# Altium PCB PCB1.PcbDoc
Units mil, origin at the board's own origin, x right, y up, seen from the top; angles counter-clockwise.
Board outline 3000 x 3015 mil, 2 copper layers (Top Layer, Bottom Layer); 27 components, 21 nets, 111 pads, 4 vias.
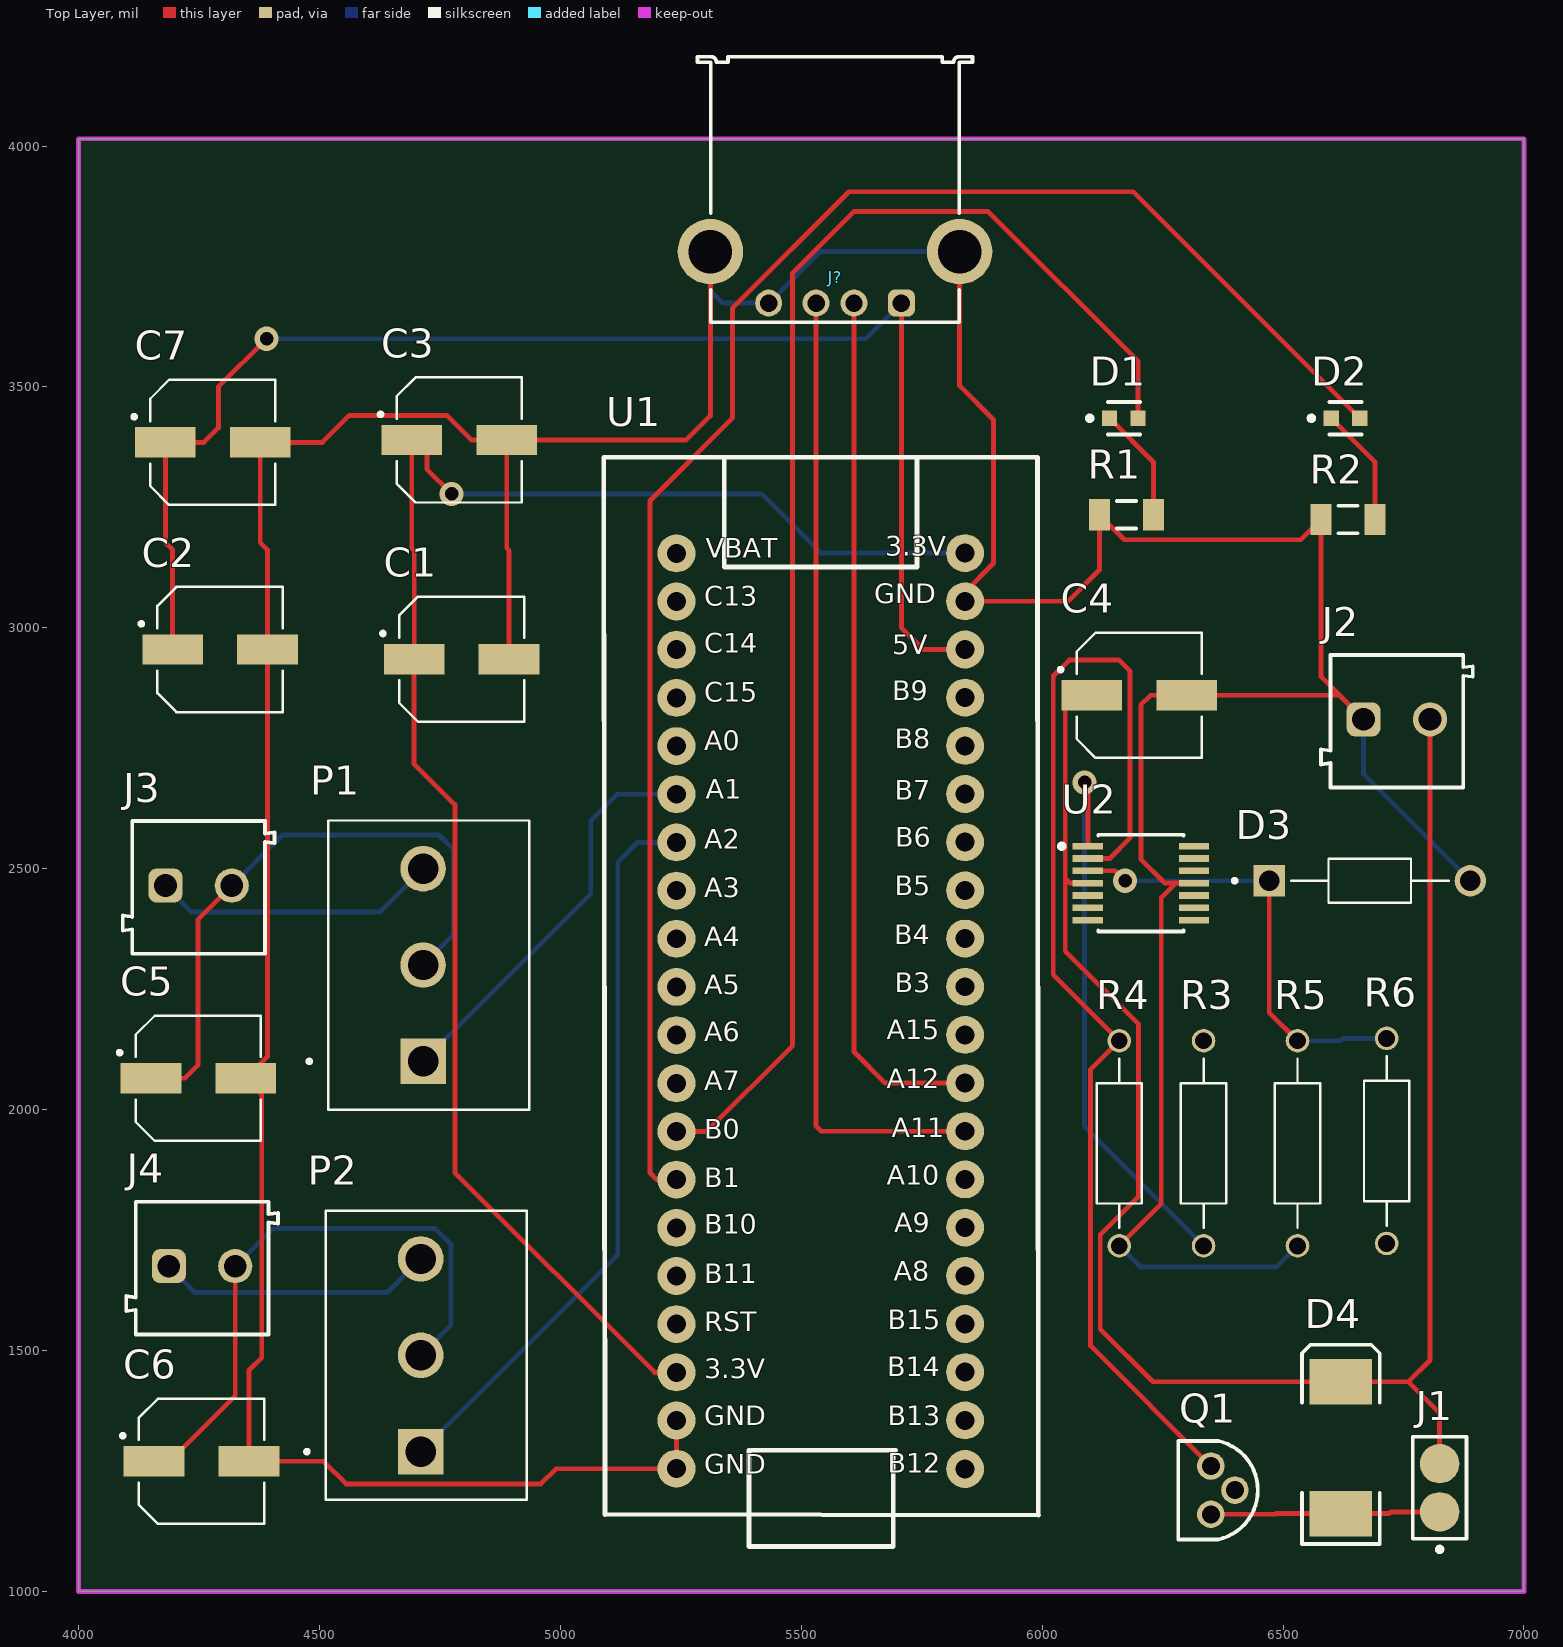
[diagram p0: Top Layer view]
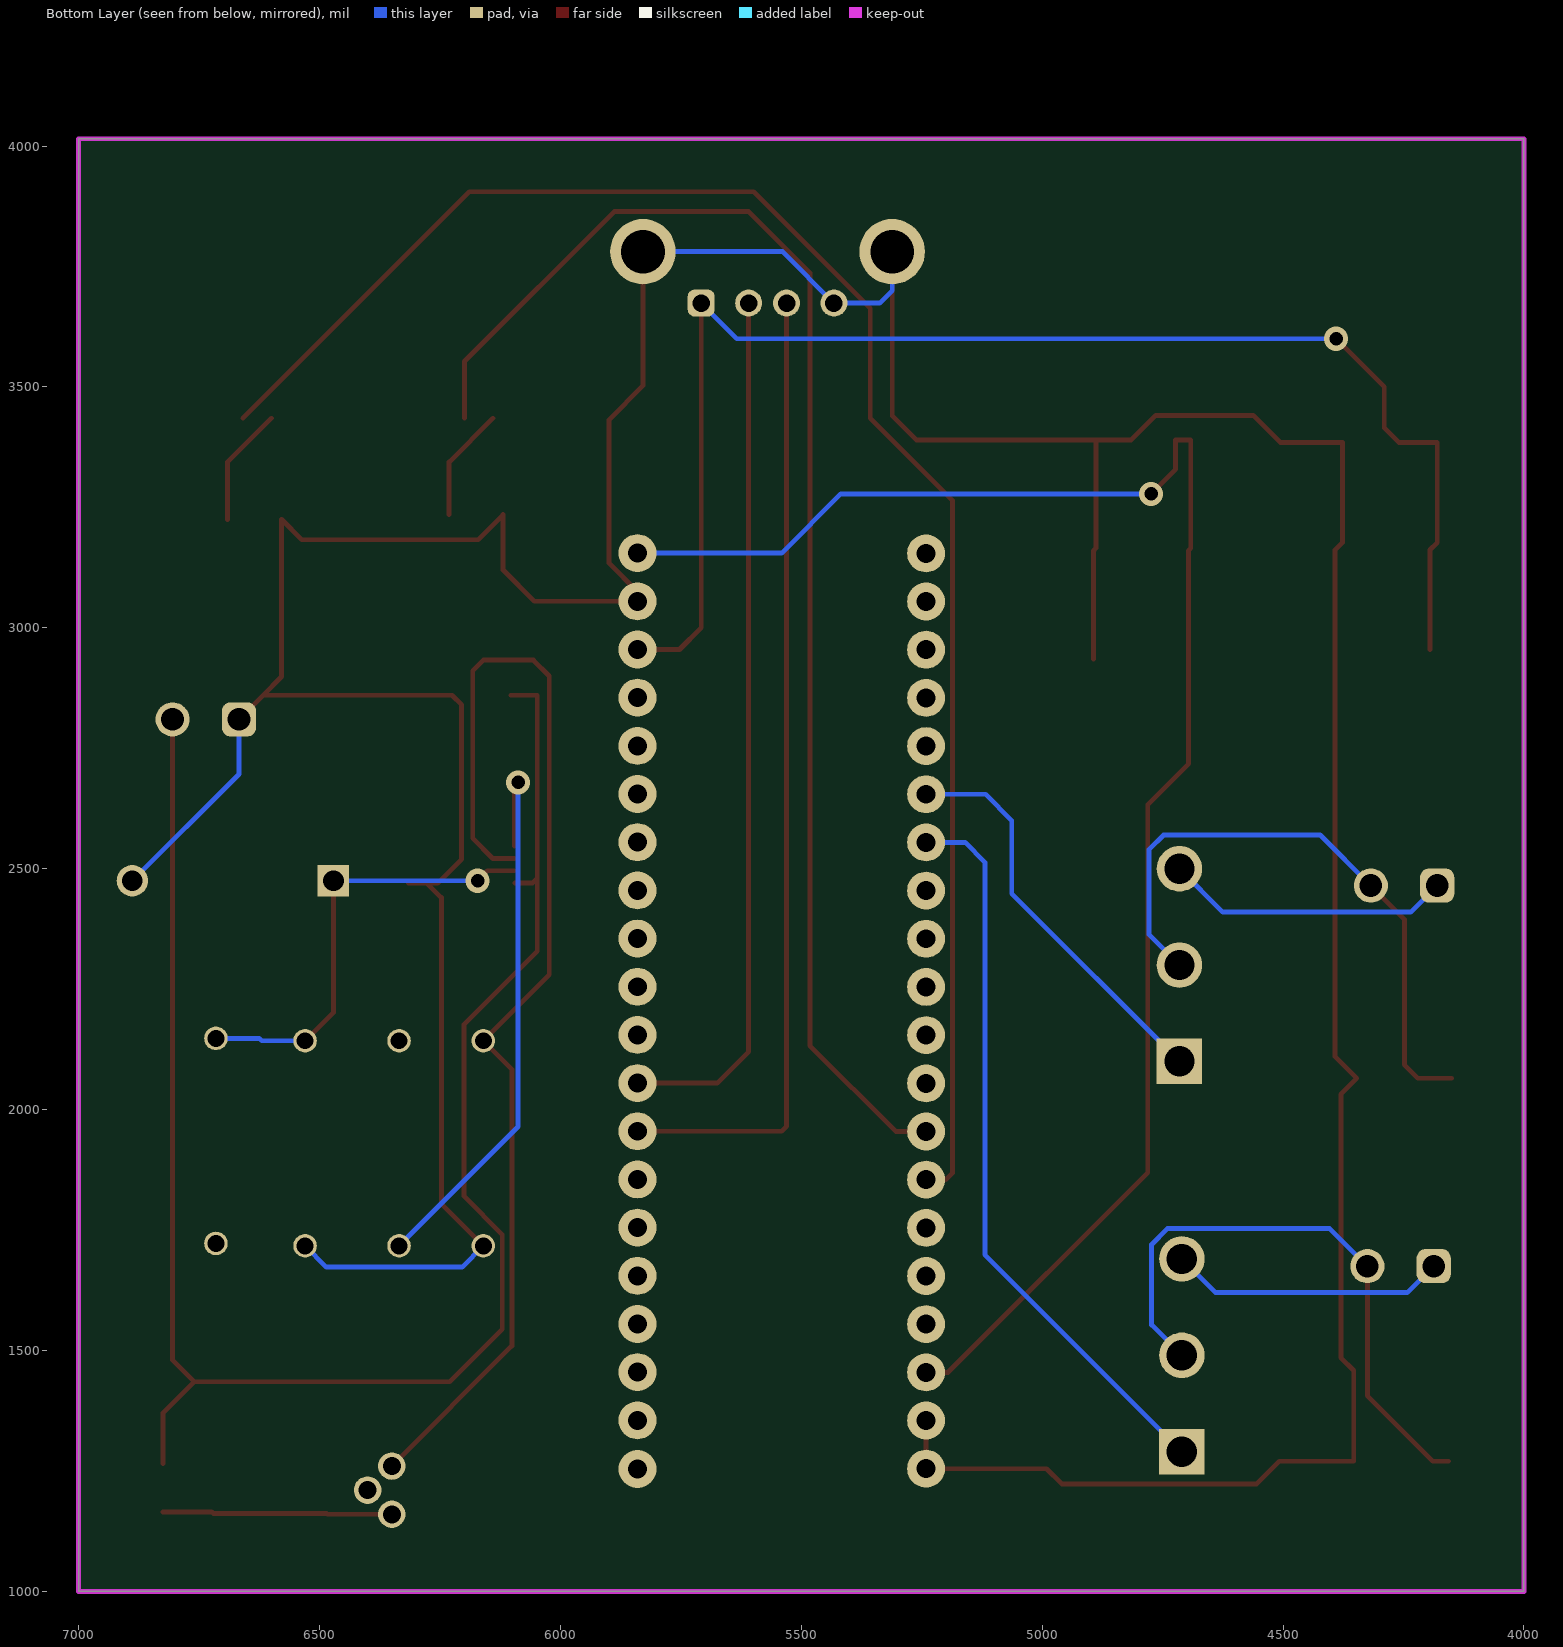
[diagram p1: Bottom Layer view, seen from below]

## Layer stack, top to bottom
Top Solder: solder mask 0.4, Solder Resist, Dk 3.5
Top Layer: signal copper 1.4
Dielectric 1: dielectric 12.6, FR-4, Dk 4.8
Bottom Layer: signal copper 1.4
Bottom Solder: solder mask 0.4, Solder Resist, Dk 3.5

## Board outline
4000,1000 4000,4015 7000,4015 7000,1000

## Design rules (kind name [scope] priority, off if disabled: settings)
Clearance [All] p1: gap=10 ignorepadtopadclearanceinfootprint=FALSE
PolygonConnect [All] p1: connectstyle=Relief reliefconductorwidth=10 reliefentries=4 polygonreliefangle="90 Angle" airgapwidth=10
RoutingVias [All] p1: holewidth=28 width=50 viastyle="Through Hole" minholewidth=28 minwidth=50 maxholewidth=28 maxwidth=50
SolderMaskExpansion [All] p1: expansion=4 istentingtop=FALSE
SupplyNets "Schematic Supply Nets_2" [InNet('+3.3')] p1: voltage=0.000
SupplyNets "Schematic Supply Nets_1" [InNet('+5')] p2: voltage=0.000
SupplyNets "Schematic Supply Nets" [InNet('GND')] p3: voltage=0.000
Width [All] p1: maxlimit=10 minlimit=10 preferedwidth=10
30 further rules are at their usual default settings.

## Components (designator, comment, footprint, x,y, rotation, side; value= is the part's Value field where it differs from the comment)
C1 "EEE1EA470WP" CAP_EEE1EA470WP 4795,2935 r0 top
C2 "EEE1EA470WP" CAP_EEE1EA470WP 4293.43,2955 r0 top
C3 "EEE1EA470WP" CAP_EEE1EA470WP 4790,3390 r0 top
C4 "EEE1EA470WP" CAP_EEE1EA470WP 6201.57,2860 r0 top
C5 "EEE1EA470WP" CAP_EEE1EA470WP 4248.43,2065 r0 top
C6 "EEE1EA470WP" CAP_EEE1EA470WP 4255,1270 r0 top
C7 "EEE1EA470WP" CAP_EEE1EA470WP 4278.43,3385 r0 top
D1 "LTST-C190GKT" FP-LTST-C190GKT-MFG 6169.53,3435 r0 top
D2 "LTST-C190GKT" FP-LTST-C190GKT-MFG 6629.53,3435 r0 top
D3 "1N4760A" DIOAD1060W70L435D230 6680,2475 r0 top
D4 "Diode" SMC 6620,1298.19 r90 top
J1 "837-22-002-30-001101" FP-837-22-002-30-001101-MFG 6825,1215 r90 top
J2 "Battery 12V" 691103110002 56736.1,52806.06 r0 top
J3 "Battery 8.4V" 691103110002 54248.9,52461.06 r0 top
J4 "Battery 8.4V" 691103110002 54256.1,51671.06 r0 top
J? "61400416021" 61400416021 5570,3910 r180 top
P1 "servo" CUI_TB009-508-03BE 4715,2100 r90 top
P2 "servo" CUI_TB009-508-03BE 4710,1290 r90 top
Q1 "SS8050DBU" FP-135AN-MFG 6365,1210 r180 top
R1 "ERJ-8GEY0R00V" RESC3216X70X50NL05T20 6175,3235 r0 top
R2 "ERJ-8GEY0R00V" RESC3216X70X50NL05T20 6635,3225 r0 top
R3 "RNC55H3300BSRE6" RESAD1081W64L635D269 6335,1930 r90 top
R4 "RNC55H3300BSRE6" RESAD1081W64L635D269 6160,1930 r90 top
R5 "RNC55H3300BSRE6" RESAD1081W64L635D269 6530,1930 r90 top
R6 "RNC55H3300BSRE6" RESAD1081W64L635D269 6715,1935 r90 top
U1 "STM32F103C8T6" "Stm32 BluePill" 5531.8,2431.5 r0 top
U2 "LM324PW" FP-PW0014A-MFG 6205,2470 r0 top

## Footprints (in the part's own frame and the unit in brackets; to place one, negate y for a bottom-side part, rotate by r counter-clockwise, add the part's x,y. Pads: shape width x height; smd on the part's side, far side on the other; paste and mask are expansions set on the pad)
61400416021 [mm] "USB 2.0 Type A Horizontal"
  rrect50% 1.42x1.42 hole 0.92: 1(-3.5,5.99)
  round 1.42 hole 0.92: 2(-1,5.99) 3(1,5.99) 4(3.5,5.99)
  round 3.45 hole 2.3: Shell(-6.57,3.28) Shell(6.57,3.28)
  silkscreen extent -7.25,-7 7.25,7, body extent -8,-7 8,7, height 7.63
691103110002 [mm] "3,50mm - modular - blue - Horizontal wire entry - Pressure clamp - 8,4mm height - 02p"
  rrect50% 1.8x1.8 hole 1.2: 1(-1271.75,-1269.9)
  round 1.8 hole 1.2: 2(-1268.25,-1269.9)
  silkscreen extent -1274,-1273.5 -1266,-1266.5, body extent -1274,-1273.5 -1266,-1266.5, height 8.45
CAP_EEE1EA470WP [mm]
  rect 3.2x1.6 smd: 1(-2.5,0) 2(2.5,0)
  silkscreen extent -4.25,-3.3 3.3,3.3, body extent -3.65,-3.3 3.65,3.3, height 5.8
CUI_TB009-508-03BE [mm]
  rect 2.4x2.4 / inner round 2.4 / far side rect 2.4x2.4 hole 1.6: 1(0,0)
  round 2.4 hole 1.6: 2(5.08,0) 3(10.16,0)
  silkscreen extent -2.54,-5.6 12.7,6.1, body extent -3.14,-5.6 13.3,4.9, height 19.5
DIOAD1060W70L435D230 [mm]
  round 1.65 hole 1.1: A(5.3,0)
  rect 1.65x1.65 / inner round 1.65 / far side rect 1.65x1.65 hole 1.1: C(-5.3,0)
  silkscreen extent -7.22,-1.15 4.15,1.15, body extent -5.55,-1.4 5.55,1.4, height 2.8
FP-135AN-MFG [mm]
  round 1.45 hole 0.95 paste-2539.97 mask+0: 1(0.38,-1.27) 2(-0.89,0) 3(0.38,1.27)
  silkscreen extent -2.1,-2.6 2.09,2.6, body extent -2.19,-2.7 2.19,2.7, height 0.25
FP-837-22-002-30-001101-MFG [mm]
  round 2.08 smd paste+0 mask+0: 1(-1.27,0) 2(1.27,0)
  silkscreen extent -3.37,-1.42 2.69,1.42, body extent -2.64,-1.37 2.64,1.37, height 0.25
FP-LTST-C190GKT-MFG [mm]
  rect 0.8x0.8 smd paste+0 mask+0: 1(-0.75,0) 2(0.75,0)
  silkscreen extent -1.92,-0.85 0.85,0.85, body extent -1.25,-0.55 1.25,0.55, height 0.25
FP-PW0014A-MFG [mm]
  rect 1.6x0.35 smd paste-1000 mask+0: 1(-2.8,1.95) 2(-2.8,1.3) 3(-2.8,0.65) 4(-2.8,0) 5(-2.8,-0.65) 6(-2.8,-1.3) 7(-2.8,-1.95) 8(2.8,-1.95) 9(2.8,-1.3) 10(2.8,-0.65) 11(2.8,0) 12(2.8,0.65) 13(2.8,1.3) 14(2.8,1.95)
  silkscreen extent -4.3,-2.55 2.25,2.55, body extent -3.7,-2.8 3.7,2.8, height 0.25
RESAD1081W64L635D269 [mm]
  round 1.24 hole 0.89: 1(-5.405,0) 2(5.405,0)
  silkscreen extent -4.47,-1.2 4.47,1.2, body extent -5.72,-1.35 5.72,1.35, height 2.69
RESC3216X70X50NL05T20 [mm] "Chip Resistor, 2-Leads, Body 3.20x1.60mm, IPC Medium Density"
  rect 1.1x1.65 smd: 1(-1.425,0) 2(1.425,0)
  silkscreen extent -0.5,-0.73 0.5,0.73, body extent -1.63,-0.82 1.62,0.82, height 0.7
SMC [mm] "DO-214-AB/SMC; 2 C-Bend Leads; Body 7.9 x 5.9 mm, inc. leads (LxW)"
  rect 2.4x3.3 smd: 1(-3.475,0) 2(3.475,0)
  silkscreen extent -5.07,-2.05 5.43,2.06
"Stm32 BluePill" [mm]
  round 2 hole 1: 1(7.828,-29.909) 2(7.828,-27.343) 3(7.828,-24.803) 4(7.828,-22.263) 5(7.828,-19.723) 6(7.828,-17.183) 7(7.828,-14.643) 8(7.828,-12.103) 9(7.828,-9.563) 10(7.828,-7.023) 11(7.828,-4.483) 12(7.828,-1.943) 13(7.828,0.597) 14(7.828,3.137) 15(7.828,5.677) 16(7.828,8.217) 17(7.828,10.757) 18(7.828,13.297) 19(7.828,15.837) 20(7.828,18.377) 21(-7.386,18.366) 22(-7.386,15.826) 23(-7.386,13.286) 24(-7.386,10.746) 25(-7.386,8.206) 26(-7.386,5.666) 27(-7.386,3.126) 28(-7.386,0.586) 29(-7.386,-1.954) 30(-7.386,-4.494) 31(-7.386,-7.034) 32(-7.386,-9.574) 33(-7.386,-12.114) 34(-7.386,-14.654) 35(-7.386,-17.194) 36(-7.386,-19.734) 37(-7.386,-22.274) 38(-7.386,-24.814) 39(-7.386,-27.354) 40(-7.386,-29.894)
  silkscreen extent -11.22,-34 11.69,23.43, body extent -11.18,-33.27 11.68,24.29, height 12.31

## Part data
C1 C2 C3 C4 C5 C6 C7: "47ÂµF 25V Aluminum Electrolytic Capacitors Radial, Can - SMD 1000 Hrs @ 85Â°C", Package="RADIAL-2 Panasonic", Availability="In Stock", Check_prices=https://www.snapeda.com/parts/EEE-1EA470WP/Panasonic%20Electronic%20Components/view-part/286288/?ref=eda, MF="Panasonic Electronic", MP=EEE-1EA470WP, Price=None, SnapEDA_Link=https://www.snapeda.com/parts/EEE-1EA470WP/Panasonic%20Electronic%20Components/view-part/286288/?ref=snap
D1 D2: library part CMP-22017-000005-2, "LED GREEN CLEAR CHIP SMD", Case Code (Imperial)=0603, Case Code (Metric)=1608, Color=Green, Forward Current=30mA, Forward Voltage=2.1V, Lens Color=Colorless, Max Operating Temperature=85°C, Min Operating Temperature=-55°C, Package Quantity=1, Power Dissipation=100mW, Reverse Voltage=5V, Test Current=10mA, Voltage=2V, Case/Package=0603, Depth=0.8mm, Dominant Wavelength=569nm, Height=0.8mm, Illumination Color=Green, Lead Free="Lead Free", Length=1.6mm, Lens Style=Clear, Lens Transparency=Clear, Luminous Intensity=6mcd, Mount="Surface Mount", Number of Elements=1, Number of LEDs=1, Number of Pins=2, Packaging="Tape and Reel", Power Rating=100mW, Radiation Hardening=No, Viewing Angle=130°, Wavelength=565nm, Width=0.8mm
D3: "DO-204AL (DO-41), 1000mW, 5%, Zener Diode", Package="DO-41-2 Taiwan Semiconductor", Check_prices=https://www.snapeda.com/parts/1N4760A/Taiwan+Semiconductor/view-part/?ref=eda, MF="Taiwan Semiconductor", MP=1N4760A, SnapEDA_Link=https://www.snapeda.com/parts/1N4760A/Taiwan+Semiconductor/view-part/?ref=snap
D4: "Default Diode", Code_JEDEC=DO-214-AB, LatestRevisionDate=17-Jul-2002, LatestRevisionNote="Re-released for DXP Platform.", PackageDescription="DO-214-AB/SMC; 2 C-Bend Leads; Body 7.9 x 5.9 mm, inc. leads (LxW)", PackageReference=SMC, PackageVersion=Sep-1996, Published=8-Jun-2000, Publisher="Altium Limited"
J1: library part CMP-07791-000013-1, "CONN SPRING PISTON 2POS SMD", Current Rating=2A, Manufacturer=Mill-Max, Voltage Rating=150V, Automotive=No, Category=Conn, ComponentLink2Description=Datasheet, ComponentLink2URL=https://www.mill-max.com/catalog/download/2019-08%3A009.1M.pdf, Conn Gender=Male, Conn Orientation=Vertical, Contact Material=Gold,Nickel, Device Class L1=Connectors, Device Class L2="Headers and Wire Housings", Device Class L3=unset, Digikey Description="CONN SPRING PISTON 2POS SMD", Height=9.63mm, Lead Free=No, Manufacturer Part Number=837-22-002-30-001101, Number Of Contacts=2, Number Of Rows=1, Octopart=https://octopart.com/837-22-002-30-001101-mill-max-76383858, Package=837-22-002-30-001101, Pitch=2.54mm, RoHS=TRUE, Standoff Height=0.41mm
J2 J3 J4: library part CMP-1502-03254-2, Color=Blue, Current=10A, Max Operating Temperature=105°C, Min Operating Temperature=-40°C, Voltage=125V, Contact Material="Brass, Copper, Nickel, Tin, Zinc", Contact Plating=Tin, Current Rating=10A, Height=8.5mm, Housing Material=Nylon, Lead Pitch=3.5mm, Length=7mm, Mount="Through Hole", NexarPartId=18818286, Number Of Contacts=2, Number of Levels=1, Number of Pins=2, Number of Positions Per Level=2, Number Of Rows=1, Packaging=Box, Pitch=3.5052mm, Plating=Steel, REACH SVHC=Unknown, RoHS=Compliant, Stripping Length=-6mm, Termination=Screw, Voltage Rating=125V, Width=8mm, Wire Gauge (Max)=26AWG, Wire Gauge (Min)=16AWG, Wire/Cable Gauge=26AWG
J?: library part CMP-1502-03227-2, Color=White, Contact Resistance=20mΩ, Current Rating=1.5A, Flammability Rating="UL94 V-0", Insulation Resistance=1GΩ, Max Operating Temperature=105°C, Min Operating Temperature=-40°C, Operating Supply Voltage=30V, Connector Type=USB, Contact Material=Copper, Contact Plating=Gold, Gender=Receptacle, Insulation Material=PBT, Lead Free="Lead Free", Length=15.8mm, Mount="Horizontal, Through Hole", NexarPartId=21041530, Number Of Contacts=4, Number of Pins=4, Number of Ports=1, Number of Positions=4, Orientation=Horizontal, REACH SVHC=Unknown, RoHS=Compliant, Termination=Solder, USB Standard="USB 2.0", Voltage Rating=30V, Voltage Rating (DC)=30V, Width=14.4mm
P1 P2: library part TB009-508-03BE, "2~24 Poles, Screw Type, Horizontal, 5.08 Pitch, 26~12 (AWG), Terminal Block Connector", Package=None, Availability="In Stock", Check_prices=https://www.snapeda.com/parts/TB009-508-03BE/CUI+Devices/view-part/?ref=eda, CUI_purchase_URL=https://www.cuidevices.com/product/interconnect/connectors/terminal-blocks/tb009-508-series?utm_source=snapeda.com&utm_medium=referral&utm_campaign=snapedaBOM, MF="CUI Devices", MP=TB009-508-03BE, Price=None, Purchase-URL=https://pricing.snapeda.com/search/part/TB009-508-03BE/?ref=eda, SnapEDA_Link=https://www.snapeda.com/parts/TB009-508-03BE/CUI+Devices/view-part/?ref=snap
Q1: library part CMP-00278-84331634-1, "SS8050DBU Bipolar (BJT) Single Transistor, NPN, 25 V, 100 MHz, 1 W, 1.5 A, 160", Case/Package=TO-92, Collector Base Voltage (VCBO)=40V, Collector Emitter Breakdown Voltage=25V, Collector Emitter Saturation Voltage=500mV, Current Rating=1.5A, Emitter Base Voltage (VEBO)=6V, Frequency=100MHz, Manufacturer Lifecycle Status=ACTIVE, Max Junction Temperature (Tj)=150°C, Max Power Dissipation=1W, Min Operating Temperature=-65°C, Output Power=2W, Collector Emitter Voltage (VCEO)=25V, Element Configuration=Single, Gain Bandwidth Product=100MHz, Height=4.58mm, hFE Min=85, Lead Free="Lead Free", Length=4.58mm, Lifecycle Status=Production, Max Collector Current=1.5A, Max Frequency=100MHz, Max Operating Temperature=150°C, Mount="Through Hole", NexarPartId=84331634, Number of Elements=1, Number of Pins=3, Packaging=Bulk, Polarity=NPN, Power Dissipation=1W, Radiation Hardening=No, REACH SVHC="No SVHC", RoHS=Compliant, Schedule B="8541290080, 8541290080", Transition Frequency=100MHz, Voltage Rating (DC)=25V, Weight=179mg, Width=3.86mm
R1 R2: library part CMP-2003-00541-1, Manufacturer=Panasonic, Part Number=ERJ-8GEY0R00V
R3 R4 R5 R6: "330 Ohms Â±0.1% 0.125W, 1/8W Through Hole Resistor Axial Military, Moisture Resistant, Weldable Metal Film", Package="erc55 Vishay", Check_prices=https://www.snapeda.com/parts/RNC55H3300BSRE6/Vishay/view-part/?ref=eda, MF=Vishay, MP=RNC55H3300BSRE6, SnapEDA_Link=https://www.snapeda.com/parts/RNC55H3300BSRE6/Vishay/view-part/?ref=snap
U1: library part BluePill, "Designed By @Alixahedi"
U2: library part CMP-04895-000008-1, "IC OPAMP GP 4 CIRCUIT 14TSSOP", Ambient Temperature Range High=+70°C, Ambient Temperature Range Low=0°C, Input Bias Current=-0.02uA, Input Offset Voltage=3mV, Manufacturer="Texas Instruments", Max Dual Supply Voltage=16V, Max Junction Temp=+150°C, Max Supply Voltage=32V, Min Dual Supply Voltage=1.5V, Min Supply Voltage=3V, Nominal Supply Current=0.7-1.4mA, Output Current per Channel=20mA, Package=PW0014A, Temperature="0°C to +70°C", Voltage Gain=100V/mV, Automotive=No, Category=IC, ComponentLink2Description=Datasheet, ComponentLink2URL=http://www.ti.com/lit/ds/symlink/lm324.pdf, Device Class L1="Integrated Circuits (ICs)", Device Class L2="Linear ICs", Device Class L3="Amplifiers - Op Amps", Digikey Description="IC OPAMP GP 4 CIRCUIT 14TSSOP", Gain Bandwidth=1.2MHz, Height=1.2mm, Ipc Land Pattern Name=SOP65P640X120-14, Lead Free=Yes, Manufacturer Part Number=LM324PW, Mouser Description="Operational Amplifiers - Op Amps Quad General-Purpose Op Amp", Number of Channels=4, Octopart=https://octopart.com/lm324pw-texas+instruments-1176274, RoHS=TRUE, Standoff Height=0.05mm, Temperature Range High=+70°C, Temperature Range Low=0°C

## Via types
v1: diameter 50, hole 28, Top Layer to Bottom Layer, 4 vias

## Nets (pads, with @x,y where several pads share a name; then routed paths per layer and width w, separated by ;. In a path a pad name is that pad's centre, name@x,y a point inside that pad or via, vN(x,y) a via of type N, cw(c..) or ccw(c..) an arc to the next point about the centre after c; other vN are vias at no path point)
+3.3: C1.1 C3.1 U1.20 U1.38 | length 3472
  Top Layer w10: v1(4774,3278) 4723,3329 4723,3390 C3.1 4691.57,3165 4696.57,3160 C1.1 4696,2935 4696,2718 4781,2633 4781,1869 5195.43,1454.57 U1.38
  Bottom Layer w10: v1(4774,3278) 5418,3278 5541,3155 U1.20
+5: C2.1 C7.1 J?.1 U1.18 | length 2958.6
  Top Layer w10: C2.1 4195,3162 4180,3177 C7.1 4260,3385 4290,3415 4290,3500 v1(4390,3600) ; J?.1 5707.8,3000 5752.8,2955 U1.18
  Bottom Layer w10: v1(4390,3600) 5633.62,3600 J?.1
GND: C1.2 C2.2 C3.2 C4.2 C5.2 C6.2 C7.2 D3.A J2.1 J?.4 J?.Shell R1.1 R2.1 R4.1 R5.1 U1.19 U1.39 U1.40 U2.11 | length 10292.1
  Top Layer w10: C1.2 4893.43,3160 4888.43,3165 C3.2 ; U1.39 U1.40 4991,1254.57 4959.43,1223 4555,1223 4508,1270 C6.2 4353.43,1458.43 4380,1485 4380,2031.85 C5.2 4391.85,2110 C2.2 4391.85,3162 4376.85,3177 C7.2 4506,3385 4562,3441 4764,3441 4815,3390 C3.2 ; J?.Shell@5311.34,3780.87 5311.34,3440 5261.34,3390 C3.2 ; J?.Shell@5828.66,3780.87 5828.66,3502.34 5899,3432 5899,3134 5840,3075 U1.19 6053.9,3055 6118.9,3120 R1.1 6170.9,3183 6536.9,3183 R2.1 6578.9,2898.31 6617.2,2860 ; R4.1 6247,1804.2 6247,2440 6277,2470 ; U2.11 6277,2470 ; J2.1 6617.2,2860 ; 6277,2470 6255,2470 6205,2520 6205,2840 6225,2860 C4.2 6617.2,2860
  Bottom Layer w10: J?.Shell@5311.34,3780.87 5311.34,3700 5337.16,3674.17 J?.4 5538.9,3780.87 J?.Shell@5828.66,3780.87 ; R4.1 6204.2,1673 6485.8,1673 R5.1 ; J2.1 6667.2,2696.46 D3.A
NetC4_1: C4.1 D4.2 J1.2 J2.2 U2.4 | length 3792.8
  Top Layer w10: U2.4 6058,2470 6048,2480 ; C4.1 6048,2860 6048,2480 ; J2.2 6805,1480 6760,1435 ; J1.2 6825,1370 6760,1435 ; 6048,2480 6048,2329 6200,2177 6200,1820 6120.59,1740.59 6120.59,1544.41 6230,1435 D4.2 6760,1435
NetC5_1: C5.1 J3.2 P1.2 | length 1292.7
  Top Layer w10: C5.1 4220,2065 4248,2093 4248,2395.2 J3.2
  Bottom Layer w10: J3.2 4422.8,2570 4748,2570 4778,2540 4778,2363 P1.2
NetC6_1: C6.1 J4.2 P2.2 | length 1243.8
  Top Layer w10: C6.1 4189,1270 4325,1406 J4.2
  Bottom Layer w10: J4.2 4403,1753 4740,1753 4773,1720 4773,1553 P2.2
NetD1_1: D1.1 R1.2 | length 237.7
  Top Layer w10: D1.1 6231.1,3343.9 R1.2
NetD2_1: D2.1 R2.2 | length 247.7
  Top Layer w10: D2.1 6691.1,3343.9 R2.2
NetD3_C: D3.C R5.2 R6.2 U2.3 | length 928.7
  Top Layer w10: U2.3 6151.41,2495.59 v1(6172,2475) ; D3.C 6471.34,2201.46 R5.2
  Bottom Layer w10: v1(6172,2475) D3.C ; R5.2 6620,2142.8 6625,2147.8 R6.2
NetD4_1: D4.1 J1.1 Q1.3 | length 477
  Top Layer w10: Q1.3 6484,1160 6485.38,1161.38 D4.1 6720,1161.38 6723.62,1165 J1.1
NetJ3_1: J3.1 P1.3 | length 595.1
  Bottom Layer w10: J3.1 4235,2410 4625,2410 P1.3
NetJ4_1: J4.1 P2.3 | length 574.6
  Bottom Layer w10: J4.1 4242.2,1620 4640,1620 P2.3
NetQ1_1: Q1.1 R4.2 U2.2 | length 2458.9
  Top Layer w10: U2.2 6140,2521.18 6182,2563.18 6182,2911 6160,2933 6056,2933 6023,2900 6023,2279.8 R4.2 6100.59,2083.39 6100.59,1509.45 Q1.1
NetR3_1: R3.1 U2.1 | length 1199.5
  Top Layer w10: v1(6088,2679) 6095,2672 6095,2546.77 U2.1
  Bottom Layer w10: v1(6088,2679) 6088,1964.2 R3.1
PA0: U1.25
PA1: P1.1 U1.26 | length 844.8
  Bottom Layer w10: P1.1 5063,2448 5063,2600 5117.57,2654.57 U1.26
PA2: P2.1 U1.27 | length 1532
  Bottom Layer w10: P2.1 5119,1699 5119,2513.57 5160,2554.57 U1.27
PB0: D1.2 U1.33 | length 2935.6
  Top Layer w10: U1.33 5304,1954.57 5482,2132.57 5482,3737 5609,3864 5888,3864 6199.06,3552.94 D1.2
PB1: D2.2 U1.34 | length 3523
  Top Layer w10: U1.34 5200,1854.57 5186,1868.57 5186,3264 5357,3435 5357,3663 5599,3905 6189.06,3905 D2.2
USB-D+: J?.3 U1.8 | length 2022.5
  Top Layer w10: J?.3 5530.63,1965.37 5541,1955 U1.8
USB-D-: J?.2 U1.9 | length 1811.7
  Top Layer w10: J?.2 5609.37,2120 5674.37,2055 U1.9
pads on no net: Q1.2 R3.2 R6.1 U1.1 U1.2 U1.3 U1.4 U1.5 U1.6 U1.7 U1.10 U1.11 U1.12 U1.13 U1.14 U1.15 U1.16 U1.17 U1.21 U1.22 U1.23 U1.24 U1.28 U1.29 U1.30 U1.31 U1.32 U1.35 U1.36 U1.37 U2.5 U2.6 U2.7 U2.8 U2.9 U2.10 U2.12 U2.13 U2.14

## Keep-outs
Keep-Out Layer:
  the board outline again, w10

## Text inside footprints (layer, text, board x,y; h text height)
J?: Top 3D Body "PCB Edge" at 5656.61,4233.62 h32 r180
U1: Top Overlay "5V" at 5689,2931.28 h70; Top Overlay "B9" at 5689,2836.28 h70; Top Overlay "B8" at 5694,2736.28 h70; Top Overlay "3.3V" at 5674,3136.28 h70; Top Overlay "GND" at 5651.8,3037.28 h70; Top Overlay "A5" at 5299,2226.28 h70; Top Overlay "A2" at 5299,2527.5 h70; Top Overlay "A3" at 5299,2427.28 h70; Top Overlay "A4" at 5299,2325.5 h70; Top Overlay "RST" at 5299,1526.28 h70; Top Overlay "B10" at 5299,1728.28 h70; Top Overlay "B11" at 5299,1626.5 h70; Top Overlay "A6" at 5299,2128.28 h70; Top Overlay "A7" at 5299,2026.5 h70; Top Overlay "B0" at 5299,1926.28 h70; Top Overlay "B1" at 5299,1825.5 h70; Top Overlay "3.3V" at 5299,1429.28 h70; Top Overlay "B15" at 5679.4,1530.28 h70; Top Overlay "A8" at 5691.5,1631.28 h70; Top Overlay "A11" at 5688.2,1929.5 h70; Top Overlay "B3" at 5694,2230.28 h70; Top Overlay "A9" at 5692.7,1732.28 h70; Top Overlay "A15" at 5676.9,2132.28 h70; Top Overlay "A12" at 5676.9,2030.5 h70; Top Overlay "A10" at 5676.9,1830.28 h70; Top Overlay "VBAT" at 5301.86,3131.5 h70; Top Overlay "B5" at 5694,2431.28 h70; Top Overlay "B14" at 5678.2,1432.5 h70; Top Overlay "B7" at 5694,2629.5 h70; Top Overlay "B4" at 5692.7,2329.5 h70; Top Overlay "B6" at 5695.2,2532.28 h70; Top Overlay "C15" at 5299,2833.28 h70; Top Overlay "C13" at 5299,3032.28 h70; Top Overlay "C14" at 5299,2934.28 h70; Top Overlay "A0" at 5299,2732.28 h70; Top Overlay "A1" at 5301.8,2631.5 h70; Top Overlay "GND" at 5299,1331.28 h70; Top Overlay "B13" at 5679,1331.28 h70; Top Overlay "GND" at 5299,1230.28 h70; Top Overlay "B12" at 5679.4,1232.5 h70